# EAGLE board newboarddesign (EAGLE 9.1.0)
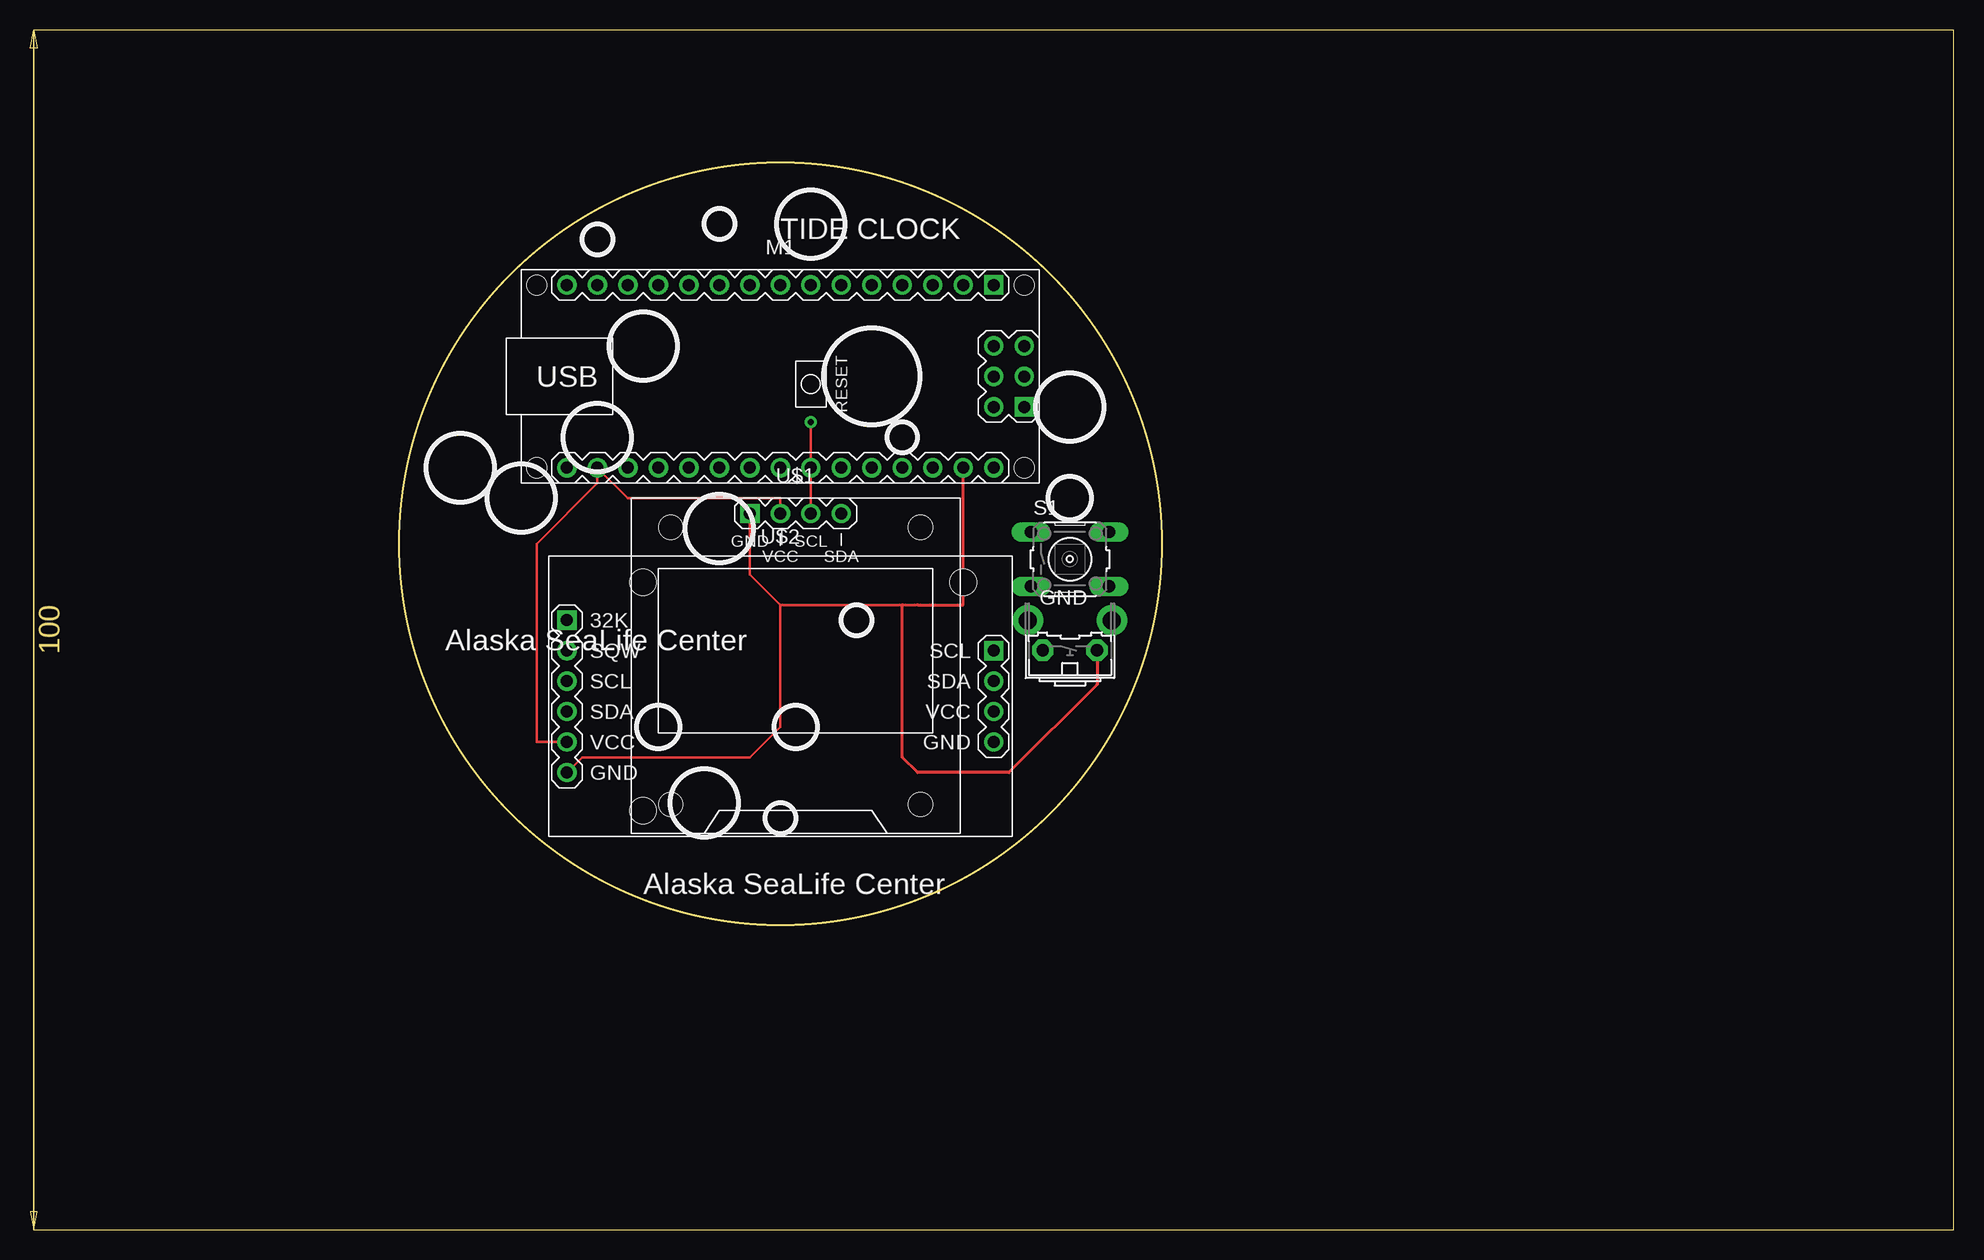
[diagram p0: board, top side]
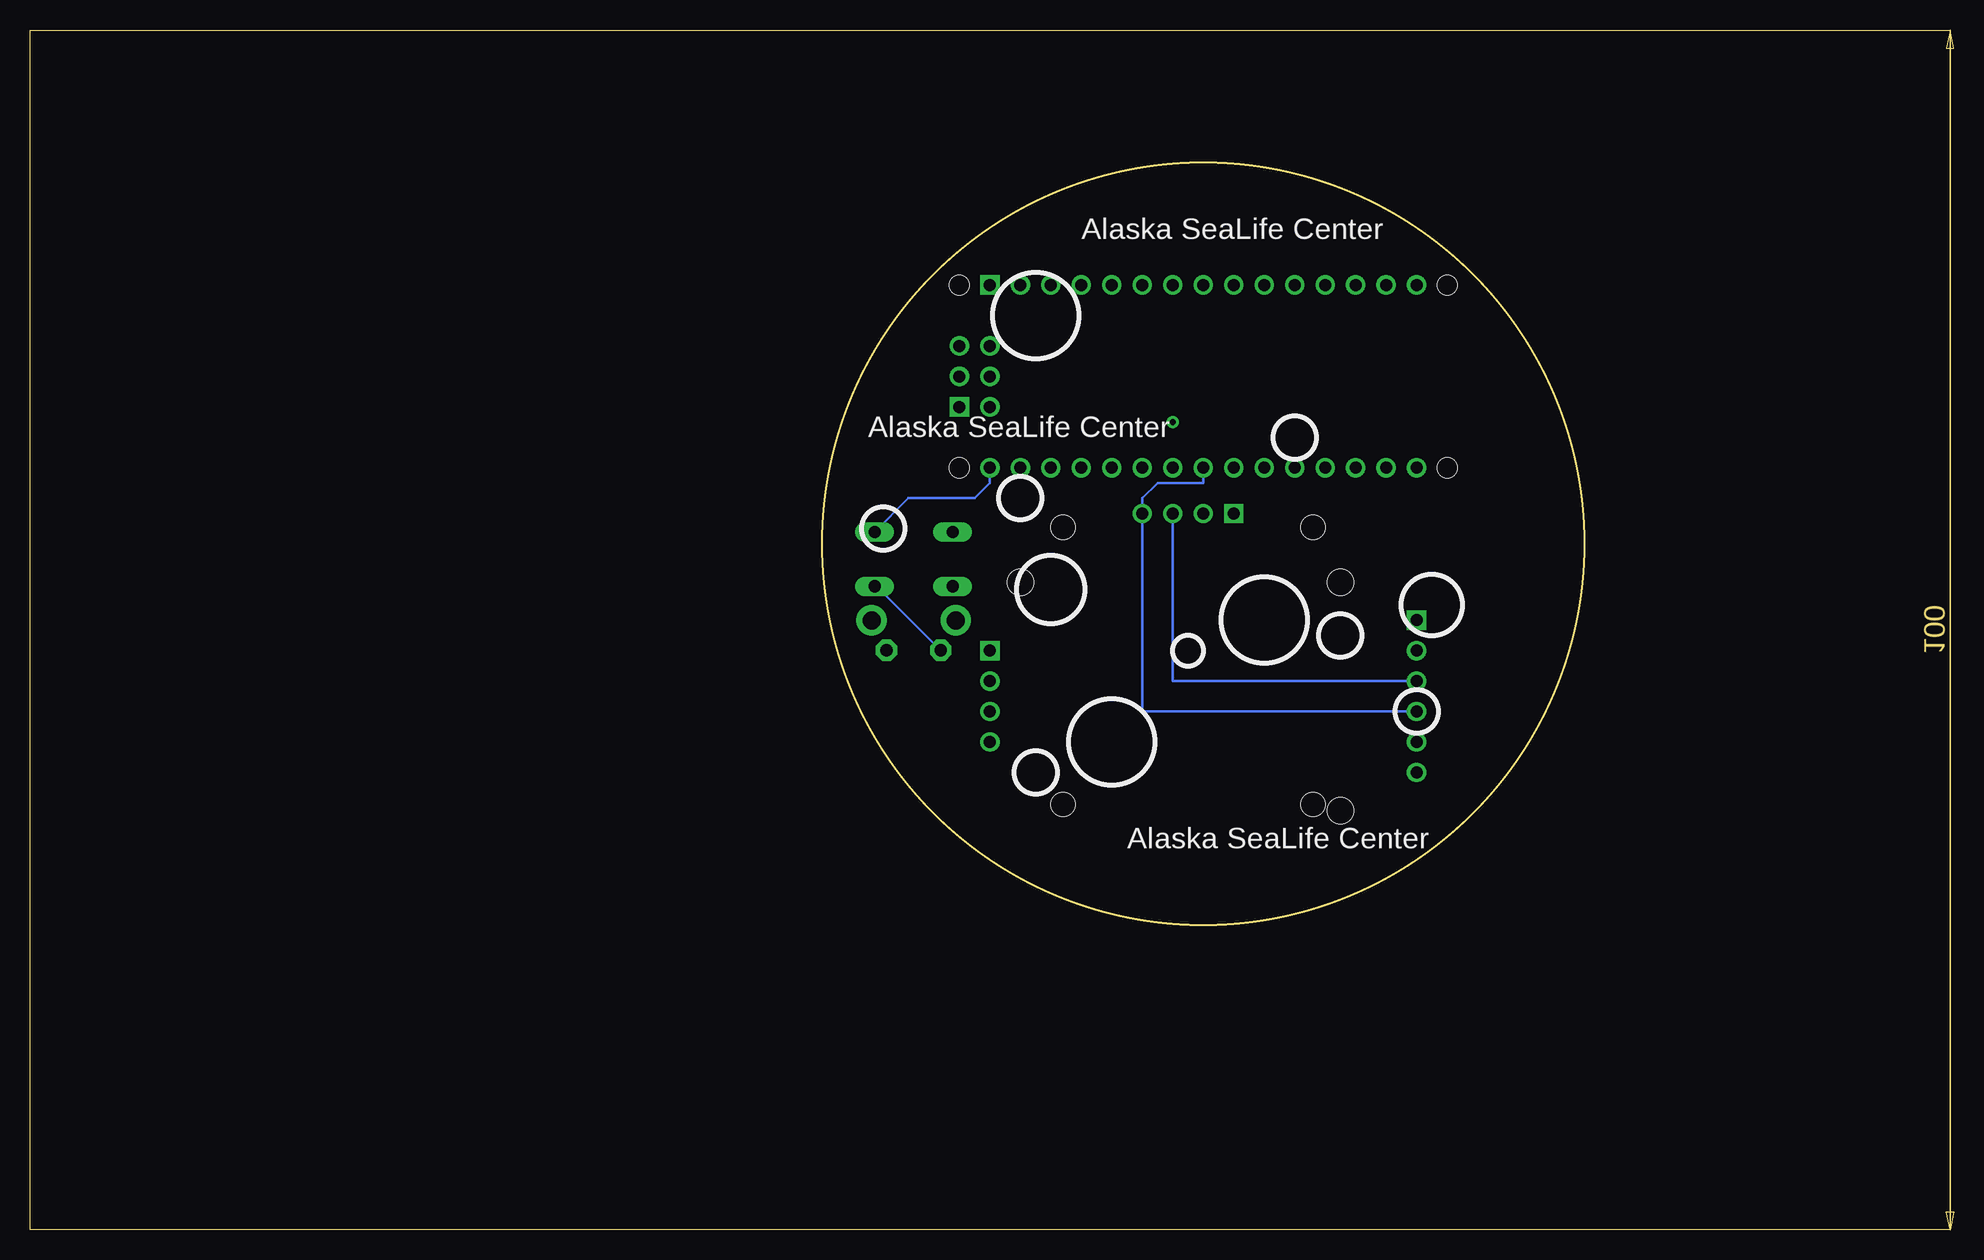
[diagram p1: board, bottom side, seen from below]

Size 160 x 100 mm. Coordinates in mm from the lower left corner, seen from the top.
Outline: 0,0 160,0 160,100 0,100
Outline: circle at 62.23,57.15 radius 31.78
Copper layers (1*16): Top 0.035mm / dielectric 1.5mm / Bottom 0.035mm
Design rules "SparkFun": minimum track width 8mil, minimum drill 20mil, track to track 8mil, track to pad 8mil, pad to pad 8mil, via to via 8mil, smd to smd 8mil, copper to edge 8mil, drill to drill 8mil, minimum pad ring 12mil, minimum via ring 10mil, stop-mask expansion 4mil, vias tented up to drill 20mil, thermal gap 10mil

## Footprints (pad centres in the part's own frame; a part is rotated, then mirrored left to right if it is on the bottom)
B3F-31XX = drill 1.016 pad 1.778 octagon: 1 -2.261,-1.245; 2 2.261,-1.245 | drill 1.499 pad 2.54: 3 -3.505,1.245; 4 3.505,1.245
ARDUINO-NANO-3.0#ISP = drill 1 square: J1.1 17.78,7.62; J4.1 20.32,-2.54 | drill 1: J1.2 15.24,7.62; J1.3 12.7,7.62; J1.4 10.16,7.62; J1.5 7.62,7.62; J1.6 5.08,7.62; J1.7 2.54,7.62; J1.8 0,7.62; J1.9 -2.54,7.62; J1.10 -5.08,7.62; J1.11 -7.62,7.62; J1.12 -10.16,7.62; J1.13 -12.7,7.62; J1.14 -15.24,7.62; J1.15 -17.78,7.62; J2.1 17.78,-7.62; J2.2 15.24,-7.62; J2.3 12.7,-7.62; J2.4 10.16,-7.62; J2.5 7.62,-7.62; J2.6 5.08,-7.62; J2.7 2.54,-7.62; J2.8 0,-7.62; J2.9 -2.54,-7.62; J2.10 -5.08,-7.62; J2.11 -7.62,-7.62; J2.12 -10.16,-7.62; J2.13 -12.7,-7.62; J2.14 -15.24,-7.62; J2.15 -17.78,-7.62; J4.2 17.78,-2.54; J4.3 20.32,0; J4.4 17.78,0; J4.5 20.32,2.54; J4.6 17.78,2.54 | hole 1.651: -20.32,7.62; -20.32,-7.62; 20.32,-7.62; 20.32,7.62
B3F-10XX = drill 1.016 long: 1 -3.251,2.261; 2 3.251,2.261; 3 -3.251,-2.261; 4 3.251,-2.261
DISPLAY-OLED-128X64-I2C = drill 1 square: 1 -3.81,12.7 | drill 1: 2 -1.27,12.7; 3 1.27,12.7; 4 3.81,12.7 | hole 2: -10.414,11.557; 10.414,11.557; 10.414,-11.557; -10.414,-11.557
RTC-DS3231-AT24C32 = drill 1 square: J1.1 -17.78,6.35; J2.1 17.78,3.81 | drill 1: J1.2 -17.78,3.81; J1.3 -17.78,1.27; J1.4 -17.78,-1.27; J1.5 -17.78,-3.81; J1.6 -17.78,-6.35; J2.2 17.78,1.27; J2.3 17.78,-1.27; J2.4 17.78,-3.81 | hole 2.2: -11.43,-9.525; -11.43,9.525; 15.24,9.525

## Placement (x,y rotation side)
GND  [B3F-31XX]  86.36,49.53 0 top
M1  ARDUINO-NANO-3.0#ISP  [ARDUINO-NANO-3.0#ISP]  62.23,71.12 0 top
S1  [B3F-10XX]  86.36,55.88 0 top
U$1  DISPLAY-OLED-128X64-I2C  [DISPLAY-OLED-128X64-I2C]  63.5,46.99 0 top
U$2  RTC-DS3231-AT24C32  [RTC-DS3231-AT24C32]  62.23,44.45 0 top

## Library data of the parts
GND = adafruit
M1 U$1 U$2 = diy-modules
S1 = switch-omron; MPN: B3F-1000; OC_FARNELL: 176432; OC_NEWARK: 36M3542

## Nets
3V3: M1.J2.14 U$1.2 U$2.J1.5
5V: M1.J2.4
A4: M1.J2.8 U$1.4 U$2.J1.4
A5: M1.J2.7 U$1.3 U$2.J1.3
B0: GND.1 S1.4
GND: GND.2 M1.J2.2 U$1.1 U$2.J1.6
GND.1: M1.J1.4
GND.2: U$2.J2.4
VCC: M1.J2.1 S1.2
VCC.2: U$2.J2.3

## Tracks (layer width: path | path; a pad name or v marks a point on that pad's centre or on a via)
3V3
  Top 0.203: U$2.J1.5 41.91,40.64 41.91,57.15 46.99,62.23 M1.J2.14 49.53,60.96 62.23,60.96 U$1.2
A4
  Bottom 0.203: U$2.J1.4 67.31,43.18 U$1.4 67.31,60.96 66.04,62.23 62.23,62.23 M1.J2.8
A5  (via drill 0.51)
  Top 0.203: U$1.3 M1.J2.7 v64.77,67.31
  Bottom 0.203: U$2.J1.3 64.77,45.72 U$1.3
B0
  Bottom 0.203: GND.1 89.43,53.62 S1.4
GND
  Top 0.203: U$1.1 59.69,54.61 62.23,52.07 | 62.23,52.07 72.39,52.07 73.66,52.07 | U$2.J1.6 45.72,39.37 59.69,39.37 62.23,41.91 62.23,52.07
  Top 0.254: GND.2 88.62,45.44 81.28,38.1 73.66,38.1 72.39,39.37 72.39,52.07 | 73.66,52.07 77.47,52.07 M1.J2.2
VCC
  Bottom 0.203: S1.2 86.79,60.96 81.28,60.96 80.01,62.23 M1.J2.1

## Text on the board
tPlace: TIDE CLOCK | Alaska SeaLife Center | Alaska SeaLife Center
bPlace: Alaska SeaLife Center | Alaska SeaLife Center | Alaska SeaLife Center